# Altium PCB PCB2_homemade.PcbDoc (part 3 of 3)
Units mil, origin at the board's own origin, x right, y up, seen from the top; angles counter-clockwise.
Board outline 1822.68 x 4094.49 mil, 2 copper layers (Top Layer, Bottom Layer); 17 components, 26 nets, 94 pads, 23 vias.
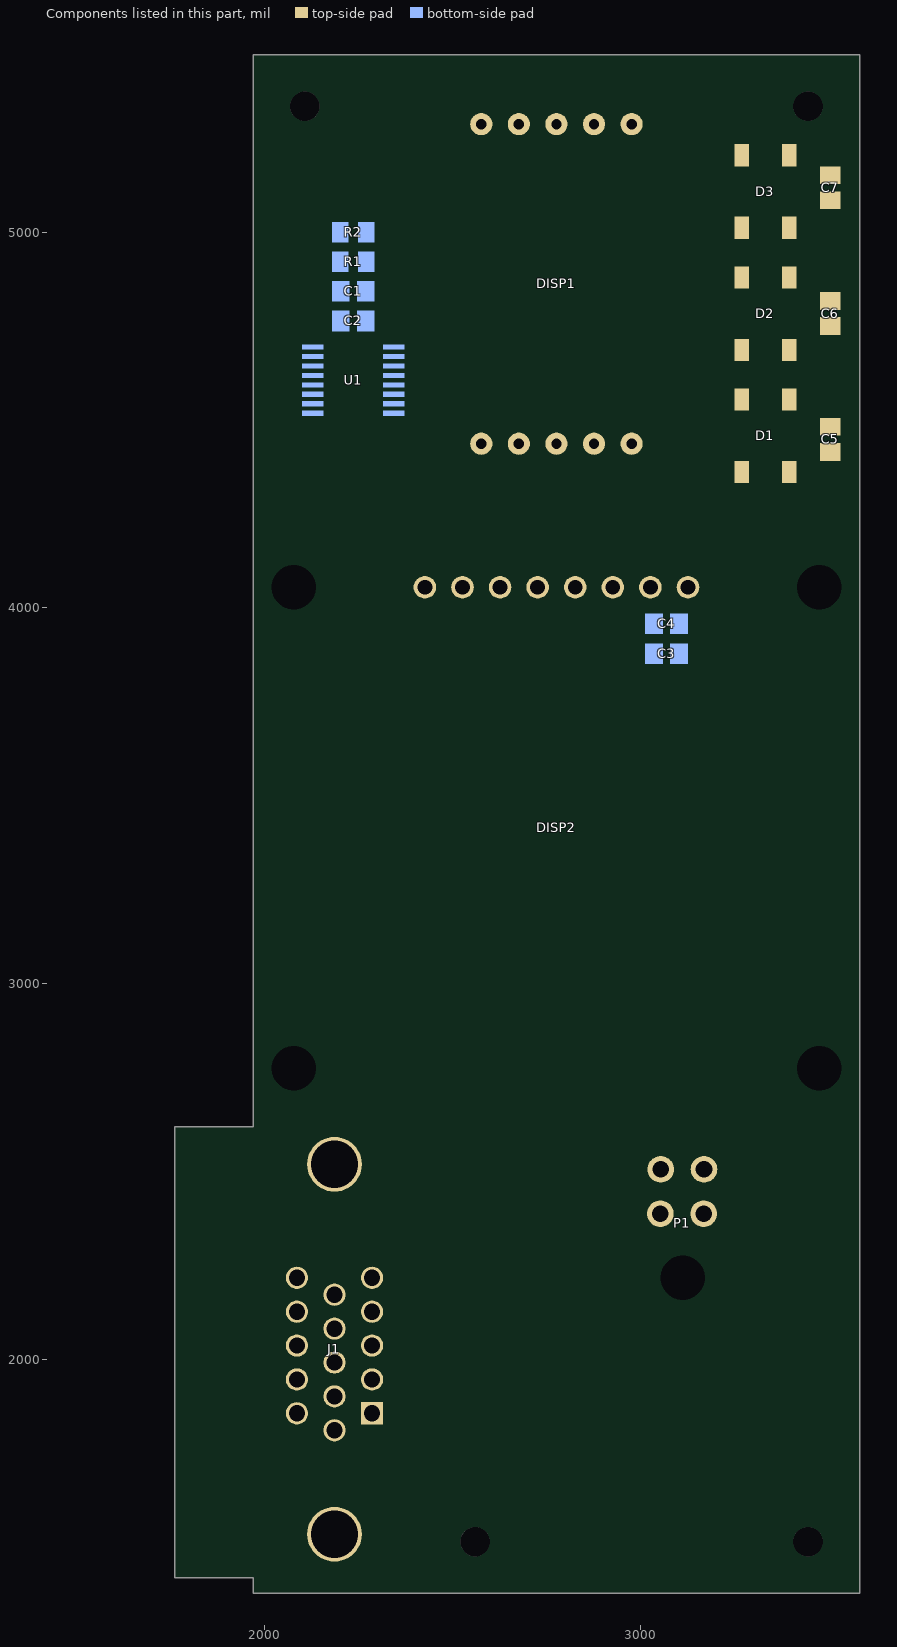
[diagram p3: the components of this part, seen from the top]

## Via types
v1: diameter 35.43/35.43 (per signal layer), hole 11.81, Top Layer to Bottom Layer, tented both sides, 23 vias

## Nets (pads, with @x,y where several pads share a name; then routed paths per layer and width w, separated by ;. In a path a pad name is that pad's centre, name@x,y a point inside that pad or via, vN(x,y) a via of type N, cw(c..) or ccw(c..) an arc to the next point about the centre after c; other vN are vias at no path point) (continued)
copper on no net: (continued)
  Bottom Layer w1: 3002.91,1752.95 3033.91,1752.95 ; 3002.91,1753.95 3033.91,1753.95 ; 3002.91,1754.95 3033.91,1754.95 ; 3003.91,1751.95 3033.91,1751.95 ; 3004.91,1750.95 3033.91,1750.95 ; 3005.91,1795.95 3340.91,1795.95 ; 3005.91,1837.95 3340.91,1837.95 ; 3006.91,1668.95 3035.91,1668.95 ; 3006.91,1669.95 3035.91,1669.95 ; 3006.91,1670.95 3036.91,1670.95 ; 3006.91,1671.95 3036.91,1671.95 ; 3006.91,1672.95 3037.91,1672.95 ; 3006.91,1673.95 3037.91,1673.95 ; 3006.91,1674.95 3038.91,1674.95 ; 3006.91,1675.95 3039.91,1675.95 ; 3006.91,1676.95 3040.91,1676.95 ; 3006.91,1677.95 3041.91,1677.95 ; 3006.91,1852.95 3048.91,1852.95 ; 3007.91,1665.95 3036.91,1665.95 ; 3007.91,1666.95 3035.91,1666.95 ; 3007.91,1667.95 3035.91,1667.95 ; 3007.91,1678.95 3043.91,1678.95 ; 3007.91,1679.95 3340.91,1679.95 ; 3007.91,1727.95 3009.91,1727.95 ; 3008.91,1662.95 3035.91,1662.95 ; 3008.91,1663.95 3080.91,1663.95 ; 3008.91,1664.95 3037.91,1664.95 ; 3008.91,1680.95 3340.91,1680.95 ; 3009.91,1661.95 3035.91,1661.95 ; 3009.91,1697.95 3033.91,1697.95 ; 3009.91,1698.95 3033.91,1698.95 ; 3009.91,1838.95 3340.91,1838.95 ; 3010.91,1659.95 3035.91,1659.95 ; 3010.91,1660.95 3035.91,1660.95 ; 3010.91,1681.95 3340.91,1681.95 ; 3010.91,1749.95 3033.91,1749.95 ; 3010.91,1794.95 3340.91,1794.95 ; 3010.91,1853.95 3053.91,1853.95 ; 3011.91,1682.95 3340.91,1682.95 ; 3011.91,1685.95 3340.91,1685.95 ; 3011.91,1686.95 3340.91,1686.95 ; 3011.91,1696.95 3033.91,1696.95 ; 3012.91,1687.95 3340.91,1687.95 ; 3012.91,1688.95 3340.91,1688.95 ; 3012.91,1689.95 3340.91,1689.95 ; 3012.91,1690.95 3033.91,1690.95 ; 3012.91,1691.95 3033.91,1691.95 ; 3012.91,1692.95 3033.91,1692.95 ; 3012.91,1693.95 3033.91,1693.95 ; 3012.91,1694.95 3033.91,1694.95 ; 3012.91,1695.95 3033.91,1695.95 ; 3012.91,1839.95 3340.91,1839.95 ; 3013.91,1683.95 3340.91,1683.95 ; 3013.91,1684.95 3340.91,1684.95 ; 3014.91,1793.95 3340.91,1793.95 ; 3015.91,1719.95 3033.91,1719.95 ; 3015.91,1720.95 3020.91,1720.95 ; 3015.91,1721.95 3020.91,1721.95 ; 3015.91,1722.95 3020.91,1722.95 ; 3015.91,1723.95 3020.91,1723.95 ; 3015.91,1854.95 3059.91,1854.95 ; 3016.91,1724.95 3019.91,1724.95 ; 3016.91,1725.95 3019.91,1725.95 ; 3016.91,1840.95 3340.91,1840.95 ; 3017.91,1726.95 3019.91,1726.95 ; 3018.91,1792.95 3340.91,1792.95 ; 3020.91,1791.95 3340.91,1791.95 ; 3020.91,1841.95 3340.91,1841.95 ; 3020.91,1855.95 3065.91,1855.95 ; 3022.91,1720.95 3033.91,1720.95 ; 3022.91,1721.95 3033.91,1721.95 ; 3022.91,1748.95 3033.91,1748.95 ; 3023.91,1722.95 3033.91,1722.95 ; 3023.91,1723.95 3033.91,1723.95 ; 3023.91,1724.95 3033.91,1724.95 ; 3023.91,1725.95 3033.91,1725.95 ; 3023.91,1790.95 3340.91,1790.95 ; 3024.91,1726.95 3033.91,1726.95 ; 3024.91,1727.95 3033.91,1727.95 ; 3024.91,1728.95 3033.91,1728.95 ; 3024.91,1747.95 3033.91,1747.95 ; 3025.91,1729.95 3033.91,1729.95 ; 3025.91,1730.95 3033.91,1730.95 ; 3025.91,1731.95 3033.91,1731.95 ; 3025.91,1746.95 3033.91,1746.95 ; 3025.91,1789.95 3340.91,1789.95 ; 3025.91,1842.95 3340.91,1842.95 ; 3025.91,1856.95 3072.91,1856.95 ; 3026.91,1732.95 3033.91,1732.95 ; 3026.91,1733.95 3033.91,1733.95 ; 3026.91,1734.95 3033.91,1734.95 ; 3026.91,1745.95 3033.91,1745.95 ; 3027.91,1735.95 3033.91,1735.95 ; 3027.91,1736.95 3033.91,1736.95 ; 3027.91,1737.95 3033.91,1737.95 ; 3027.91,1738.95 3033.91,1738.95 ; 3027.91,1739.95 3033.91,1739.95 ; 3027.91,1740.95 3033.91,1740.95 ; 3027.91,1741.95 3033.91,1741.95 ; 3027.91,1742.95 3033.91,1742.95 ; 3027.91,1743.95 3033.91,1743.95 ; 3027.91,1744.95 3033.91,1744.95 ; 3027.91,1788.95 3340.91,1788.95 ; 3029.91,1787.95 3340.91,1787.95 ; 3029.91,1843.95 3340.91,1843.95 ; 3030.91,1785.95 3340.91,1785.95 ; 3030.91,1786.95 3340.91,1786.95 ; 3030.91,1857.95 3078.91,1857.95 ; 3034.91,1844.95 3340.91,1844.95 ; 3036.91,1858.95 3086.91,1858.95 ; 3039.91,1845.95 3340.91,1845.95 ; 3042.91,1664.95 3080.91,1664.95 ; 3042.91,1859.95 3095.91,1859.95 ; 3043.91,1649.95 3080.91,1649.95 ; 3043.91,1650.95 3080.91,1650.95 ; 3043.91,1651.95 3080.91,1651.95 ; 3043.91,1652.95 3080.91,1652.95 ; 3043.91,1653.95 3080.91,1653.95 ; 3043.91,1654.95 3080.91,1654.95 ; 3043.91,1665.95 3080.91,1665.95 ; 3043.91,1666.95 3080.91,1666.95 ; 3043.91,1667.95 3080.91,1667.95 ; 3043.91,1668.95 3079.91,1668.95 ; 3044.91,1647.95 3080.91,1647.95 ; 3044.91,1648.95 3080.91,1648.95 ; 3044.91,1669.95 3079.91,1669.95 ; 3044.91,1670.95 3078.91,1670.95 ; 3045.91,1646.95 3080.91,1646.95 ; 3045.91,1671.95 3077.91,1671.95 ; 3045.91,1846.95 3340.91,1846.95 ; 3048.91,1860.95 3106.91,1860.95 ; 3050.91,1645.95 3080.91,1645.95 ; 3050.91,1847.95 3340.91,1847.95 ; 3054.91,1861.95 3340.91,1861.95 ; 3055.91,1848.95 3340.91,1848.95 ; 3056.91,1690.95 3093.91,1690.95 ; 3056.91,1691.95 3093.91,1691.95 ; 3056.91,1692.95 3093.91,1692.95 ; 3056.91,1693.95 3093.91,1693.95 ; 3056.91,1694.95 3093.91,1694.95 ; 3056.91,1695.95 3093.91,1695.95 ; 3056.91,1696.95 3093.91,1696.95 ; 3056.91,1697.95 3093.91,1697.95 ; 3056.91,1698.95 3093.91,1698.95 ; 3056.91,1699.95 3093.91,1699.95 ; 3056.91,1700.95 3093.91,1700.95 ; 3056.91,1701.95 3093.91,1701.95 ; 3056.91,1702.95 3093.91,1702.95 ; 3056.91,1703.95 3093.91,1703.95 ; 3056.91,1704.95 3093.91,1704.95 ; 3056.91,1705.95 3093.91,1705.95 ; 3056.91,1706.95 3093.91,1706.95 ; 3056.91,1707.95 3093.91,1707.95 ; 3056.91,1708.95 3093.91,1708.95 ; 3056.91,1709.95 3093.91,1709.95 ; 3056.91,1710.95 3093.91,1710.95 ; 3056.91,1711.95 3093.91,1711.95 ; 3056.91,1712.95 3093.91,1712.95 ; 3056.91,1713.95 3093.91,1713.95 ; 3056.91,1714.95 3093.91,1714.95 ; 3056.91,1715.95 3093.91,1715.95 ; 3056.91,1716.95 3093.91,1716.95 ; 3056.91,1717.95 3093.91,1717.95 ; 3056.91,1718.95 3093.91,1718.95 ; 3056.91,1719.95 3093.91,1719.95 ; 3056.91,1741.95 3093.91,1741.95 ; 3056.91,1742.95 3093.91,1742.95 ; 3056.91,1743.95 3093.91,1743.95 ; 3056.91,1744.95 3093.91,1744.95 ; 3056.91,1745.95 3093.91,1745.95 ; 3056.91,1746.95 3093.91,1746.95 ; 3056.91,1747.95 3093.91,1747.95 ; 3056.91,1748.95 3093.91,1748.95 ; 3056.91,1749.95 3093.91,1749.95 ; 3056.91,1750.95 3093.91,1750.95 ; 3056.91,1751.95 3093.91,1751.95 ; 3056.91,1752.95 3093.91,1752.95 ; 3056.91,1753.95 3093.91,1753.95 ; 3056.91,1754.95 3093.91,1754.95 ; 3056.91,1755.95 3093.91,1755.95 ; 3056.91,1756.95 3093.91,1756.95 ; 3056.91,1757.95 3093.91,1757.95 ; 3056.91,1758.95 3093.91,1758.95 ; 3056.91,1759.95 3093.91,1759.95 ; 3056.91,1760.95 3093.91,1760.95 ; 3056.91,1761.95 3093.91,1761.95 ; 3056.91,1762.95 3093.91,1762.95 ; 3056.91,1763.95 3093.91,1763.95 ; 3056.91,1764.95 3093.91,1764.95 ; 3056.91,1765.95 3093.91,1765.95 ; 3056.91,1766.95 3093.91,1766.95 ; 3056.91,1767.95 3093.91,1767.95 ; 3056.91,1768.95 3093.91,1768.95 ; 3056.91,1769.95 3093.91,1769.95 ; 3056.91,1770.95 3093.91,1770.95 ; 3056.91,1771.95 3095.91,1771.95 ; 3060.91,1849.95 3340.91,1849.95 ; 3060.91,1862.95 3340.91,1862.95 ; 3065.91,1662.95 3080.91,1662.95 ; 3066.91,1655.95 3080.91,1655.95 ; 3066.91,1850.95 3340.91,1850.95 ; 3067.91,1661.95 3080.91,1661.95 ; 3067.91,1863.95 3340.91,1863.95 ; 3068.91,1656.95 3080.91,1656.95 ; 3068.91,1657.95 3080.91,1657.95 ; 3068.91,1658.95 3080.91,1658.95 ; 3068.91,1659.95 3080.91,1659.95 ; 3068.91,1660.95 3080.91,1660.95 ; 3071.91,1851.95 3340.91,1851.95 ; 3075.91,1638.95 3080.91,1638.95 ; 3075.91,1864.95 3340.91,1864.95 ; 3076.91,1852.95 3340.91,1852.95 ; 3077.91,1639.95 3080.91,1639.95 ; 3077.91,1643.95 3080.91,1643.95 ; 3077.91,1644.95 3080.91,1644.95 ; 3078.91,1640.95 3080.91,1640.95 ; 3078.91,1641.95 3080.91,1641.95 ; 3078.91,1642.95 3080.91,1642.95 ; 3079.91,1678.95 3122.91,1678.95 ; 3081.91,1677.95 3121.91,1677.95 ; 3082.91,1853.95 3340.91,1853.95 ; 3083.91,1676.95 3119.91,1676.95 ; 3083.91,1865.95 3340.91,1865.95 ; 3084.91,1675.95 3118.91,1675.95 ; 3085.91,1673.95 3116.91,1673.95 ; 3085.91,1674.95 3117.91,1674.95 ; 3086.91,1672.95 3115.91,1672.95 ; 3087.91,1645.95 3092.91,1645.95 ; 3087.91,1646.95 3095.91,1646.95 ; 3087.91,1666.95 3111.91,1666.95 ; 3087.91,1667.95 3111.91,1667.95 ; 3087.91,1668.95 3112.91,1668.95 ; 3087.91,1669.95 3113.91,1669.95 ; 3087.91,1670.95 3114.91,1670.95 ; 3087.91,1671.95 3114.91,1671.95 ; 3087.91,1854.95 3340.91,1854.95 ; 3088.91,1647.95 3097.91,1647.95 ; 3088.91,1648.95 3098.91,1648.95 ; 3088.91,1649.95 3099.91,1649.95 ; 3088.91,1650.95 3100.91,1650.95 ; 3088.91,1651.95 3101.91,1651.95 ; 3088.91,1652.95 3101.91,1652.95 ; 3088.91,1653.95 3102.91,1653.95 ; 3088.91,1654.95 3103.91,1654.95 ; 3088.91,1655.95 3103.91,1655.95 ; 3088.91,1656.95 3104.91,1656.95 ; 3088.91,1657.95 3105.91,1657.95 ; 3088.91,1658.95 3105.91,1658.95 ; 3088.91,1659.95 3106.91,1659.95 ; 3088.91,1660.95 3107.91,1660.95 ; 3088.91,1661.95 3107.91,1661.95 ; 3088.91,1662.95 3108.91,1662.95 ; 3088.91,1663.95 3109.91,1663.95 ; 3088.91,1664.95 3109.91,1664.95 ; 3088.91,1665.95 3110.91,1665.95 ; 3092.91,1866.95 3204.91,1866.95 ; 3093.91,1855.95 3340.91,1855.95 ; 3095.91,1638.95 3136.91,1638.95 ; 3098.91,1639.95 3134.91,1639.95 ; 3099.91,1856.95 3340.91,1856.95 ; 3100.91,1640.95 3133.91,1640.95 ; 3101.91,1641.95 3133.91,1641.95 ; 3102.91,1642.95 3133.91,1642.95 ; 3103.91,1643.95 3133.91,1643.95 ; 3103.91,1867.95 3186.91,1867.95 ; 3104.91,1644.95 3133.91,1644.95 ; 3105.91,1645.95 3133.91,1645.95 ; 3105.91,1857.95 3340.91,1857.95 ; 3106.91,1646.95 3133.91,1646.95 ; 3107.91,1647.95 3133.91,1647.95 ; 3108.91,1648.95 3133.91,1648.95 ; 3108.91,1649.95 3133.91,1649.95 ; 3109.91,1650.95 3133.91,1650.95 ; 3110.91,1651.95 3133.91,1651.95 ; 3111.91,1652.95 3133.91,1652.95 ; 3111.91,1653.95 3133.91,1653.95 ; 3112.91,1654.95 3133.91,1654.95 ; 3113.91,1655.95 3133.91,1655.95 ; 3113.91,1656.95 3133.91,1656.95 ; 3113.91,1858.95 3340.91,1858.95 ; 3114.91,1657.95 3133.91,1657.95 ; 3115.91,1658.95 3133.91,1658.95 ; 3115.91,1659.95 3133.91,1659.95 ; 3116.91,1660.95 3133.91,1660.95 ; 3116.91,1661.95 3133.91,1661.95 ; 3116.91,1690.95 3144.91,1690.95 ; 3116.91,1691.95 3140.91,1691.95 ; 3116.91,1692.95 3138.91,1692.95 ; 3116.91,1693.95 3136.91,1693.95 ; 3116.91,1694.95 3134.91,1694.95 ; 3116.91,1695.95 3133.91,1695.95 ; 3116.91,1696.95 3131.91,1696.95 ; 3116.91,1697.95 3130.91,1697.95 ; 3116.91,1698.95 3129.91,1698.95 ; 3116.91,1699.95 3128.91,1699.95 ; 3116.91,1700.95 3127.91,1700.95 ; 3116.91,1701.95 3126.91,1701.95 ; 3116.91,1702.95 3125.91,1702.95 ; 3116.91,1703.95 3125.91,1703.95 ; 3116.91,1704.95 3124.91,1704.95 ; 3116.91,1705.95 3123.91,1705.95 ; 3116.91,1706.95 3123.91,1706.95 ; 3116.91,1707.95 3122.91,1707.95 ; 3116.91,1708.95 3122.91,1708.95 ; 3116.91,1709.95 3122.91,1709.95 ; 3116.91,1710.95 3121.91,1710.95 ; 3116.91,1711.95 3121.91,1711.95 ; 3116.91,1712.95 3121.91,1712.95 ; 3116.91,1713.95 3121.91,1713.95 ; 3116.91,1714.95 3121.91,1714.95 ; 3116.91,1715.95 3121.91,1715.95 ; 3116.91,1716.95 3120.91,1716.95 ; 3116.91,1717.95 3120.91,1717.95 ; 3116.91,1718.95 3120.91,1718.95 ; 3116.91,1719.95 3120.91,1719.95 ; 3116.91,1741.95 3184.91,1741.95 ; 3116.91,1742.95 3184.91,1742.95 ; 3116.91,1743.95 3184.91,1743.95 ; 3116.91,1744.95 3120.91,1744.95 ; 3116.91,1745.95 3120.91,1745.95 ; 3116.91,1746.95 3120.91,1746.95 ; 3116.91,1747.95 3120.91,1747.95 ; 3116.91,1748.95 3120.91,1748.95 ; 3116.91,1749.95 3121.91,1749.95 ; 3116.91,1750.95 3121.91,1750.95 ; 3116.91,1751.95 3121.91,1751.95 ; 3116.91,1752.95 3122.91,1752.95 ; 3116.91,1753.95 3122.91,1753.95 ; 3116.91,1754.95 3123.91,1754.95 ; 3116.91,1755.95 3123.91,1755.95 ; 3116.91,1756.95 3124.91,1756.95 ; 3116.91,1757.95 3124.91,1757.95 ; 3116.91,1758.95 3125.91,1758.95 ; 3116.91,1759.95 3126.91,1759.95 ; 3116.91,1760.95 3127.91,1760.95 ; 3116.91,1761.95 3128.91,1761.95 ; 3116.91,1762.95 3129.91,1762.95 ; 3116.91,1763.95 3130.91,1763.95 ; 3116.91,1764.95 3131.91,1764.95 ; 3116.91,1765.95 3133.91,1765.95 ; 3116.91,1766.95 3135.91,1766.95 ; 3116.91,1767.95 3136.91,1767.95 ; 3116.91,1768.95 3139.91,1768.95 ; 3116.91,1769.95 3141.91,1769.95 ; 3116.91,1770.95 3145.91,1770.95 ; 3116.91,1771.95 3152.91,1771.95 ; 3116.91,1868.95 3165.91,1868.95 ; 3117.91,1662.95 3133.91,1662.95 ; 3118.91,1663.95 3133.91,1663.95 ; 3119.91,1664.95 3133.91,1664.95 ; 3119.91,1665.95 3133.91,1665.95 ; 3120.91,1666.95 3133.91,1666.95 ; 3121.91,1667.95 3133.91,1667.95 ; 3122.91,1668.95 3133.91,1668.95 ; 3122.91,1859.95 3340.91,1859.95 ; 3122.91,1860.95 3340.91,1860.95 ; 3123.91,1669.95 3133.91,1669.95 ; 3124.91,1670.95 3133.91,1670.95 ; 3125.91,1671.95 3133.91,1671.95 ; 3138.91,1638.95 3148.91,1638.95 ; 3138.91,1873.95 3340.91,1873.95 ; 3140.91,1639.95 3146.91,1639.95 ; 3141.91,1640.95 3145.91,1640.95 ; 3141.91,1641.95 3145.91,1641.95 ; 3141.91,1642.95 3145.91,1642.95 ; 3141.91,1643.95 3145.91,1643.95 ; 3141.91,1644.95 3145.91,1644.95 ; 3141.91,1645.95 3145.91,1645.95 ; 3141.91,1646.95 3145.91,1646.95 ; 3141.91,1647.95 3145.91,1647.95 ; 3141.91,1648.95 3145.91,1648.95 ; 3141.91,1649.95 3145.91,1649.95 ; 3141.91,1650.95 3145.91,1650.95 ; 3141.91,1651.95 3145.91,1651.95 ; 3141.91,1652.95 3145.91,1652.95 ; 3141.91,1653.95 3145.91,1653.95 ; 3141.91,1654.95 3145.91,1654.95 ; 3141.91,1655.95 3145.91,1655.95 ; 3141.91,1656.95 3145.91,1656.95 ; 3141.91,1657.95 3145.91,1657.95 ; 3141.91,1658.95 3145.91,1658.95 ; 3141.91,1659.95 3145.91,1659.95 ; 3141.91,1660.95 3145.91,1660.95 ; 3141.91,1661.95 3145.91,1661.95 ; 3141.91,1662.95 3145.91,1662.95 ; 3141.91,1663.95 3145.91,1663.95 ; 3141.91,1664.95 3145.91,1664.95 ; 3141.91,1665.95 3145.91,1665.95 ; 3141.91,1666.95 3145.91,1666.95 ; 3141.91,1667.95 3145.91,1667.95 ; 3141.91,1668.95 3145.91,1668.95 ; 3141.91,1669.95 3145.91,1669.95 ; 3141.91,1670.95 3145.91,1670.95 ; 3141.91,1671.95 3145.91,1671.95 ; 3141.91,1672.95 3145.91,1672.95 ; 3141.91,1673.95 3145.91,1673.95 ; 3141.91,1674.95 3145.91,1674.95 ; 3141.91,1675.95 3145.91,1675.95 ; 3141.91,1676.95 3145.91,1676.95 ; 3141.91,1677.95 3145.91,1677.95 ; 3141.91,1678.95 3146.91,1678.95 ; 3143.91,1717.95 3184.91,1717.95 ; 3143.91,1718.95 3184.91,1718.95 ; 3143.91,1719.95 3184.91,1719.95 ; 3143.91,1744.95 3184.91,1744.95 ; 3144.91,1714.95 3184.91,1714.95 ; 3144.91,1715.95 3184.91,1715.95 ; 3144.91,1716.95 3184.91,1716.95 ; 3144.91,1745.95 3184.91,1745.95 ; 3144.91,1746.95 3183.91,1746.95 ; 3145.91,1713.95 3211.91,1713.95 ; 3145.91,1747.95 3182.91,1747.95 ; 3146.91,1712.95 3211.91,1712.95 ; 3146.91,1748.95 3181.91,1748.95 ; 3148.91,1711.95 3211.91,1711.95 ; 3148.91,1749.95 3180.91,1749.95 ; 3150.91,1638.95 3160.91,1638.95 ; 3152.91,1639.95 3158.91,1639.95 ; 3152.91,1678.95 3159.91,1678.95 ; 3153.91,1640.95 3157.91,1640.95 ; 3153.91,1641.95 3157.91,1641.95 ; 3153.91,1642.95 3157.91,1642.95 ; 3153.91,1643.95 3157.91,1643.95 ; 3153.91,1644.95 3158.91,1644.95 ; 3153.91,1645.95 3186.91,1645.95 ; 3153.91,1646.95 3191.91,1646.95 ; 3153.91,1647.95 3192.91,1647.95 ; 3153.91,1648.95 3193.91,1648.95 ; 3153.91,1649.95 3193.91,1649.95 ; 3153.91,1650.95 3193.91,1650.95 ; 3153.91,1651.95 3193.91,1651.95 ; 3153.91,1652.95 3193.91,1652.95 ; 3153.91,1653.95 3193.91,1653.95 ; 3153.91,1654.95 3193.91,1654.95 ; 3153.91,1655.95 3193.91,1655.95 ; 3153.91,1656.95 3193.91,1656.95 ; 3153.91,1657.95 3193.91,1657.95 ; 3153.91,1658.95 3193.91,1658.95 ; 3153.91,1659.95 3193.91,1659.95 ; 3153.91,1660.95 3193.91,1660.95 ; 3153.91,1661.95 3193.91,1661.95 ; 3153.91,1662.95 3193.91,1662.95 ; 3153.91,1663.95 3193.91,1663.95 ; 3153.91,1664.95 3193.91,1664.95 ; 3153.91,1665.95 3193.91,1665.95 ; 3153.91,1666.95 3193.91,1666.95 ; 3153.91,1667.95 3193.91,1667.95 ; 3153.91,1668.95 3193.91,1668.95 ; 3153.91,1669.95 3193.91,1669.95 ; 3153.91,1670.95 3192.91,1670.95 ; 3153.91,1671.95 3191.91,1671.95 ; 3153.91,1672.95 3159.91,1672.95 ; 3153.91,1673.95 3158.91,1673.95 ; 3153.91,1674.95 3157.91,1674.95 ; 3153.91,1675.95 3157.91,1675.95 ; 3153.91,1676.95 3157.91,1676.95 ; 3153.91,1677.95 3157.91,1677.95 ; 3167.91,1720.95 3184.91,1720.95 ; 3167.91,1721.95 3184.91,1721.95 ; 3167.91,1722.95 3184.91,1722.95 ; 3167.91,1723.95 3184.91,1723.95 ; 3167.91,1724.95 3184.91,1724.95 ; 3167.91,1725.95 3184.91,1725.95 ; 3167.91,1726.95 3184.91,1726.95 ; 3167.91,1727.95 3184.91,1727.95 ; 3167.91,1728.95 3184.91,1728.95 ; 3167.91,1729.95 3184.91,1729.95 ; 3167.91,1730.95 3184.91,1730.95 ; 3167.91,1731.95 3184.91,1731.95 ; 3167.91,1732.95 3184.91,1732.95 ; 3167.91,1733.95 3184.91,1733.95 ; 3167.91,1734.95 3184.91,1734.95 ; 3167.91,1735.95 3184.91,1735.95 ; 3167.91,1736.95 3184.91,1736.95 ; 3167.91,1737.95 3184.91,1737.95 ; 3167.91,1738.95 3184.91,1738.95 ; 3167.91,1739.95 3184.91,1739.95 ; 3167.91,1740.95 3184.91,1740.95 ; 3172.91,1872.95 3340.91,1872.95 ; 3176.91,1771.95 3213.91,1771.95 ; 3180.91,1871.95 3340.91,1871.95 ; 3183.91,1770.95 3211.91,1770.95 ; 3187.91,1769.95 3211.91,1769.95 ; 3189.91,1768.95 3211.91,1768.95 ; 3189.91,1870.95 3340.91,1870.95 ; 3190.91,1638.95 3208.91,1638.95 ; 3191.91,1767.95 3211.91,1767.95 ; 3193.91,1639.95 3206.91,1639.95 ; 3193.91,1678.95 3206.91,1678.95 ; 3193.91,1766.95 3211.91,1766.95 ; 3195.91,1640.95 3206.91,1640.95 ; 3195.91,1677.95 3206.91,1677.95 ; 3195.91,1765.95 3211.91,1765.95 ; 3196.91,1764.95 3211.91,1764.95 ; 3196.91,1869.95 3340.91,1869.95 ; 3197.91,1641.95 3206.91,1641.95 ; 3197.91,1676.95 3206.91,1676.95 ; 3197.91,1763.95 3211.91,1763.95 ; 3198.91,1642.95 3206.91,1642.95 ; 3198.91,1675.95 3206.91,1675.95 ; 3199.91,1643.95 3206.91,1643.95 ; 3199.91,1644.95 3206.91,1644.95 ; 3199.91,1673.95 3206.91,1673.95 ; 3199.91,1674.95 3206.91,1674.95 ; 3199.91,1762.95 3211.91,1762.95 ; 3200.91,1645.95 3206.91,1645.95 ; 3200.91,1646.95 3206.91,1646.95 ; 3200.91,1671.95 3206.91,1671.95 ; 3200.91,1672.95 3206.91,1672.95 ; 3200.91,1761.95 3211.91,1761.95 ; 3201.91,1647.95 3206.91,1647.95 ; 3201.91,1648.95 3206.91,1648.95 ; 3201.91,1649.95 3206.91,1649.95 ; 3201.91,1650.95 3206.91,1650.95 ; 3201.91,1651.95 3206.91,1651.95 ; 3201.91,1652.95 3206.91,1652.95 ; 3201.91,1653.95 3206.91,1653.95 ; 3201.91,1654.95 3206.91,1654.95 ; 3201.91,1655.95 3206.91,1655.95 ; 3201.91,1656.95 3206.91,1656.95 ; 3201.91,1657.95 3206.91,1657.95 ; 3201.91,1658.95 3206.91,1658.95 ; 3201.91,1659.95 3206.91,1659.95 ; 3201.91,1660.95 3206.91,1660.95 ; 3201.91,1661.95 3206.91,1661.95 ; 3201.91,1662.95 3206.91,1662.95 ; 3201.91,1663.95 3206.91,1663.95 ; 3201.91,1664.95 3206.91,1664.95 ; 3201.91,1665.95 3206.91,1665.95 ; 3201.91,1666.95 3206.91,1666.95 ; 3201.91,1667.95 3206.91,1667.95 ; 3201.91,1668.95 3206.91,1668.95 ; 3201.91,1669.95 3206.91,1669.95 ; 3201.91,1670.95 3206.91,1670.95 ; 3201.91,1759.95 3211.91,1759.95 ; 3201.91,1760.95 3211.91,1760.95 ; 3202.91,1758.95 3211.91,1758.95 ; 3203.91,1757.95 3211.91,1757.95 ; 3204.91,1755.95 3211.91,1755.95 ; 3204.91,1756.95 3211.91,1756.95 ; 3205.91,1753.95 3211.91,1753.95 ; 3205.91,1754.95 3211.91,1754.95 ; 3206.91,1750.95 3211.91,1750.95 ; 3206.91,1751.95 3211.91,1751.95 ; 3206.91,1752.95 3211.91,1752.95 ; 3207.91,1745.95 3211.91,1745.95 ; 3207.91,1746.95 3211.91,1746.95 ; 3207.91,1747.95 3211.91,1747.95 ; 3207.91,1748.95 3211.91,1748.95 ; 3207.91,1749.95 3211.91,1749.95 ; 3207.91,1866.95 3340.91,1866.95 ; 3207.91,1867.95 3340.91,1867.95 ; 3207.91,1868.95 3340.91,1868.95 ; 3208.91,1714.95 3211.91,1714.95 ; 3208.91,1715.95 3211.91,1715.95 ; 3208.91,1716.95 3211.91,1716.95 ; 3208.91,1717.95 3211.91,1717.95 ; 3208.91,1718.95 3211.91,1718.95 ; 3208.91,1719.95 3211.91,1719.95 ; 3208.91,1720.95 3211.91,1720.95 ; 3208.91,1721.95 3211.91,1721.95 ; 3208.91,1722.95 3211.91,1722.95 ; 3208.91,1723.95 3211.91,1723.95 ; 3208.91,1724.95 3211.91,1724.95 ; 3208.91,1725.95 3211.91,1725.95 ; 3208.91,1726.95 3211.91,1726.95 ; 3208.91,1727.95 3211.91,1727.95 ; 3208.91,1728.95 3211.91,1728.95 ; 3208.91,1729.95 3211.91,1729.95 ; 3208.91,1730.95 3211.91,1730.95 ; 3208.91,1731.95 3211.91,1731.95 ; 3208.91,1732.95 3211.91,1732.95 ; 3208.91,1733.95 3211.91,1733.95 ; 3208.91,1734.95 3211.91,1734.95 ; 3208.91,1735.95 3211.91,1735.95 ; 3208.91,1736.95 3211.91,1736.95 ; 3208.91,1737.95 3211.91,1737.95 ; 3208.91,1738.95 3211.91,1738.95 ; 3208.91,1739.95 3211.91,1739.95 ; 3208.91,1740.95 3211.91,1740.95 ; 3208.91,1741.95 3211.91,1741.95 ; 3208.91,1742.95 3211.91,1742.95 ; 3208.91,1743.95 3211.91,1743.95 ; 3208.91,1744.95 3211.91,1744.95 ; 3210.91,1638.95 3257.91,1638.95 ; 3212.91,1639.95 3254.91,1639.95 ; 3213.91,1640.95 3252.91,1640.95 ; 3213.91,1641.95 3251.91,1641.95 ; 3213.91,1642.95 3249.91,1642.95 ; 3213.91,1643.95 3248.91,1643.95 ; 3213.91,1644.95 3247.91,1644.95 ; 3213.91,1645.95 3246.91,1645.95 ; 3213.91,1646.95 3246.91,1646.95 ; 3213.91,1647.95 3245.91,1647.95 ; 3213.91,1648.95 3244.91,1648.95 ; 3213.91,1649.95 3243.91,1649.95 ; 3213.91,1650.95 3243.91,1650.95 ; 3213.91,1651.95 3242.91,1651.95 ; 3213.91,1652.95 3241.91,1652.95 ; 3213.91,1653.95 3241.91,1653.95 ; 3213.91,1654.95 3240.91,1654.95 ; 3213.91,1655.95 3240.91,1655.95 ; 3213.91,1656.95 3239.91,1656.95 ; 3213.91,1657.95 3238.91,1657.95 ; 3213.91,1658.95 3238.91,1658.95 ; 3213.91,1659.95 3237.91,1659.95 ; 3213.91,1660.95 3237.91,1660.95 ; 3213.91,1661.95 3236.91,1661.95 ; 3213.91,1662.95 3235.91,1662.95 ; 3213.91,1663.95 3235.91,1663.95 ; 3213.91,1664.95 3234.91,1664.95 ; 3213.91,1665.95 3233.91,1665.95 ; 3213.91,1666.95 3233.91,1666.95 ; 3213.91,1667.95 3232.91,1667.95 ; 3213.91,1668.95 3231.91,1668.95 ; 3213.91,1669.95 3230.91,1669.95 ; 3213.91,1670.95 3229.91,1670.95 ; 3213.91,1671.95 3227.91,1671.95 ; 3230.91,1678.95 3267.91,1678.95 ; 3232.91,1677.95 3265.91,1677.95 ; 3233.91,1676.95 3263.91,1676.95 ; 3235.91,1675.95 3262.91,1675.95 ; 3235.91,1690.95 3238.91,1690.95 ; 3235.91,1691.95 3238.91,1691.95 ; 3235.91,1692.95 3238.91,1692.95 ; 3235.91,1693.95 3238.91,1693.95 ; 3235.91,1694.95 3238.91,1694.95 ; 3235.91,1695.95 3238.91,1695.95 ; 3235.91,1696.95 3238.91,1696.95 ; 3235.91,1697.95 3238.91,1697.95 ; 3235.91,1698.95 3238.91,1698.95 ; 3235.91,1699.95 3238.91,1699.95 ; 3235.91,1700.95 3238.91,1700.95 ; 3235.91,1701.95 3238.91,1701.95 ; 3235.91,1702.95 3238.91,1702.95 ; 3235.91,1703.95 3238.91,1703.95 ; 3235.91,1704.95 3238.91,1704.95 ; 3235.91,1705.95 3238.91,1705.95 ; 3235.91,1706.95 3238.91,1706.95 ; 3235.91,1707.95 3238.91,1707.95 ; 3235.91,1708.95 3238.91,1708.95 ; 3235.91,1709.95 3238.91,1709.95 ; 3235.91,1710.95 3238.91,1710.95 ; 3235.91,1711.95 3276.91,1711.95 ; 3235.91,1712.95 3275.91,1712.95 ; 3235.91,1713.95 3275.91,1713.95 ; 3235.91,1714.95 3274.91,1714.95 ; 3235.91,1715.95 3274.91,1715.95 ; 3235.91,1716.95 3274.91,1716.95 ; 3235.91,1717.95 3273.91,1717.95 ; 3235.91,1718.95 3273.91,1718.95 ; 3235.91,1719.95 3272.91,1719.95 ; 3235.91,1720.95 3272.91,1720.95 ; 3235.91,1721.95 3271.91,1721.95 ; 3235.91,1722.95 3271.91,1722.95 ; 3235.91,1723.95 3270.91,1723.95 ; 3235.91,1724.95 3270.91,1724.95 ; 3235.91,1725.95 3269.91,1725.95 ; 3235.91,1726.95 3269.91,1726.95 ; 3235.91,1727.95 3268.91,1727.95 ; 3235.91,1728.95 3268.91,1728.95 ; 3235.91,1729.95 3267.91,1729.95 ; 3235.91,1730.95 3267.91,1730.95 ; 3235.91,1731.95 3266.91,1731.95 ; 3235.91,1732.95 3266.91,1732.95 ; 3235.91,1733.95 3265.91,1733.95 ; 3235.91,1734.95 3265.91,1734.95 ; 3235.91,1735.95 3264.91,1735.95 ; 3235.91,1736.95 3264.91,1736.95 ; 3235.91,1737.95 3263.91,1737.95 ; 3235.91,1738.95 3263.91,1738.95 ; 3235.91,1739.95 3262.91,1739.95 ; 3235.91,1740.95 3262.91,1740.95 ; 3235.91,1741.95 3261.91,1741.95 ; 3235.91,1742.95 3260.91,1742.95 ; 3235.91,1743.95 3259.91,1743.95 ; 3235.91,1744.95 3259.91,1744.95 ; 3235.91,1745.95 3258.91,1745.95 ; 3235.91,1746.95 3256.91,1746.95 ; 3235.91,1747.95 3255.91,1747.95 ; 3235.91,1748.95 3253.91,1748.95 ; 3235.91,1749.95 3251.91,1749.95 ; 3236.91,1674.95 3261.91,1674.95 ; 3237.91,1673.95 3261.91,1673.95 ; 3238.91,1671.95 3260.91,1671.95 ; 3238.91,1672.95 3260.91,1672.95 ; 3239.91,1670.95 3259.91,1670.95 ; 3240.91,1669.95 3259.91,1669.95 ; 3241.91,1667.95 3259.91,1667.95 ; 3241.91,1668.95 3259.91,1668.95 ; 3242.91,1666.95 3259.91,1666.95 ; 3243.91,1664.95 3259.91,1664.95 ; 3243.91,1665.95 3259.91,1665.95 ; 3243.91,1771.95 3340.91,1771.95 ; 3244.91,1662.95 3260.91,1662.95 ; 3244.91,1663.95 3260.91,1663.95 ; 3245.91,1661.95 3261.91,1661.95 ; 3246.91,1659.95 3262.91,1659.95 ; 3246.91,1660.95 3261.91,1660.95 ; 3247.91,1657.95 3265.91,1657.95 ; 3247.91,1658.95 3263.91,1658.95 ; 3248.91,1656.95 3267.91,1656.95 ; 3249.91,1654.95 3284.91,1654.95 ; 3249.91,1655.95 3271.91,1655.95 ; 3250.91,1653.95 3286.91,1653.95 ; 3251.91,1651.95 3287.91,1651.95 ; 3251.91,1652.95 3287.91,1652.95 ; 3252.91,1650.95 3287.91,1650.95 ; 3253.91,1649.95 3287.91,1649.95 ; 3254.91,1648.95 3287.91,1648.95 ; 3255.91,1647.95 3286.91,1647.95 ; 3256.91,1646.95 3285.91,1646.95 ; 3256.91,1770.95 3340.91,1770.95 ; 3258.91,1769.95 3340.91,1769.95 ; 3259.91,1645.95 3282.91,1645.95 ; 3260.91,1768.95 3340.91,1768.95 ; 3263.91,1767.95 3340.91,1767.95 ; 3265.91,1766.95 3340.91,1766.95 ; 3267.91,1665.95 3300.91,1665.95 ; 3267.91,1666.95 3300.91,1666.95 ; 3267.91,1667.95 3300.91,1667.95 ; 3267.91,1668.95 3300.91,1668.95 ; 3267.91,1669.95 3300.91,1669.95 ; 3267.91,1765.95 3340.91,1765.95 ; 3268.91,1664.95 3301.91,1664.95 ; 3268.91,1670.95 3299.91,1670.95 ; 3269.91,1671.95 3298.91,1671.95 ; 3269.91,1764.95 3340.91,1764.95 ; 3270.91,1663.95 3301.91,1663.95 ; 3270.91,1763.95 3340.91,1763.95 ; 3272.91,1762.95 3340.91,1762.95 ; 3273.91,1761.95 3340.91,1761.95 ; 3274.91,1760.95 3340.91,1760.95 ; 3275.91,1759.95 3340.91,1759.95 ; 3276.91,1758.95 3340.91,1758.95 ; 3277.91,1757.95 3340.91,1757.95 ; 3278.91,1662.95 3301.91,1662.95 ; 3278.91,1756.95 3340.91,1756.95 ; 3279.91,1754.95 3340.91,1754.95 ; 3279.91,1755.95 3340.91,1755.95 ; 3280.91,1753.95 3340.91,1753.95 ; 3281.91,1751.95 3340.91,1751.95 ; 3281.91,1752.95 3340.91,1752.95 ; 3282.91,1750.95 3340.91,1750.95 ; 3283.91,1748.95 3340.91,1748.95 ; 3283.91,1749.95 3340.91,1749.95 ; 3284.91,1638.95 3303.91,1638.95 ; 3284.91,1746.95 3340.91,1746.95 ; 3284.91,1747.95 3340.91,1747.95 ; 3285.91,1744.95 3340.91,1744.95 ; 3285.91,1745.95 3340.91,1745.95 ; 3286.91,1661.95 3301.91,1661.95 ; 3286.91,1742.95 3340.91,1742.95 ; 3286.91,1743.95 3340.91,1743.95 ; 3287.91,1639.95 3302.91,1639.95 ; 3287.91,1740.95 3340.91,1740.95 ; 3287.91,1741.95 3340.91,1741.95 ; 3288.91,1738.95 3340.91,1738.95 ; 3288.91,1739.95 3340.91,1739.95 ; 3289.91,1640.95 3301.91,1640.95 ; 3289.91,1660.95 3301.91,1660.95 ; 3289.91,1735.95 3340.91,1735.95 ; 3289.91,1736.95 3340.91,1736.95 ; 3289.91,1737.95 3340.91,1737.95 ; 3290.91,1641.95 3300.91,1641.95 ; 3290.91,1733.95 3340.91,1733.95 ; 3290.91,1734.95 3340.91,1734.95 ; 3291.91,1642.95 3300.91,1642.95 ; 3291.91,1659.95 3301.91,1659.95 ; 3291.91,1731.95 3340.91,1731.95 ; 3291.91,1732.95 3340.91,1732.95 ; 3292.91,1643.95 3300.91,1643.95 ; 3292.91,1658.95 3301.91,1658.95 ; 3292.91,1729.95 3340.91,1729.95 ; 3292.91,1730.95 3340.91,1730.95 ; 3293.91,1644.95 3300.91,1644.95 ; 3293.91,1657.95 3300.91,1657.95 ; 3293.91,1727.95 3340.91,1727.95 ; 3293.91,1728.95 3340.91,1728.95 ; 3294.91,1645.95 3300.91,1645.95 ; 3294.91,1646.95 3300.91,1646.95 ; 3294.91,1647.95 3300.91,1647.95 ; 3294.91,1654.95 3300.91,1654.95 ; 3294.91,1655.95 3300.91,1655.95 ; 3294.91,1656.95 3300.91,1656.95 ; 3294.91,1725.95 3340.91,1725.95 ; 3294.91,1726.95 3340.91,1726.95 ; 3295.91,1648.95 3300.91,1648.95 ; 3295.91,1649.95 3300.91,1649.95 ; 3295.91,1650.95 3300.91,1650.95 ; 3295.91,1651.95 3300.91,1651.95 ; 3295.91,1652.95 3300.91,1652.95 ; 3295.91,1653.95 3300.91,1653.95 ; 3295.91,1723.95 3340.91,1723.95 ; 3295.91,1724.95 3340.91,1724.95 ; 3296.91,1721.95 3340.91,1721.95 ; 3296.91,1722.95 3340.91,1722.95 ; 3297.91,1719.95 3340.91,1719.95 ; 3297.91,1720.95 3340.91,1720.95 ; 3298.91,1717.95 3340.91,1717.95 ; 3298.91,1718.95 3340.91,1718.95 ; 3299.91,1715.95 3340.91,1715.95 ; 3299.91,1716.95 3340.91,1716.95 ; 3300.91,1678.95 3340.91,1678.95 ; 3300.91,1713.95 3340.91,1713.95 ; 3300.91,1714.95 3340.91,1714.95 ; 3301.91,1711.95 3340.91,1711.95 ; 3301.91,1712.95 3340.91,1712.95 ; 3302.91,1677.95 3340.91,1677.95 ; 3302.91,1709.95 3340.91,1709.95 ; 3302.91,1710.95 3340.91,1710.95 ; 3303.91,1706.95 3340.91,1706.95 ; 3303.91,1707.95 3340.91,1707.95 ; 3303.91,1708.95 3340.91,1708.95 ; 3304.91,1676.95 3340.91,1676.95 ; 3304.91,1704.95 3340.91,1704.95 ; 3304.91,1705.95 3340.91,1705.95 ; 3305.91,1675.95 3340.91,1675.95 ; 3305.91,1702.95 3340.91,1702.95 ; 3305.91,1703.95 3340.91,1703.95 ; 3306.91,1638.95 3340.91,1638.95 ; 3306.91,1673.95 3340.91,1673.95 ; 3306.91,1674.95 3340.91,1674.95 ; 3306.91,1700.95 3340.91,1700.95 ; 3306.91,1701.95 3340.91,1701.95 ; 3307.91,1639.95 3340.91,1639.95 ; 3307.91,1671.95 3340.91,1671.95 ; 3307.91,1672.95 3340.91,1672.95 ; 3307.91,1698.95 3340.91,1698.95 ; 3307.91,1699.95 3340.91,1699.95 ; 3308.91,1640.95 3340.91,1640.95 ; 3308.91,1641.95 3340.91,1641.95 ; 3308.91,1642.95 3340.91,1642.95 ; 3308.91,1643.95 3340.91,1643.95 ; 3308.91,1644.95 3340.91,1644.95 ; 3308.91,1645.95 3340.91,1645.95 ; 3308.91,1646.95 3340.91,1646.95 ; 3308.91,1647.95 3340.91,1647.95 ; 3308.91,1648.95 3340.91,1648.95 ; 3308.91,1649.95 3340.91,1649.95 ; 3308.91,1650.95 3340.91,1650.95 ; 3308.91,1651.95 3340.91,1651.95 ; 3308.91,1652.95 3340.91,1652.95 ; 3308.91,1653.95 3340.91,1653.95 ; 3308.91,1654.95 3340.91,1654.95 ; 3308.91,1655.95 3340.91,1655.95 ; 3308.91,1656.95 3340.91,1656.95 ; 3308.91,1657.95 3340.91,1657.95 ; 3308.91,1658.95 3340.91,1658.95 ; 3308.91,1659.95 3340.91,1659.95 ; 3308.91,1660.95 3340.91,1660.95 ; 3308.91,1661.95 3340.91,1661.95 ; 3308.91,1662.95 3340.91,1662.95 ; 3308.91,1663.95 3340.91,1663.95 ; 3308.91,1664.95 3340.91,1664.95 ; 3308.91,1665.95 3340.91,1665.95 ; 3308.91,1666.95 3340.91,1666.95 ; 3308.91,1667.95 3340.91,1667.95 ; 3308.91,1668.95 3340.91,1668.95 ; 3308.91,1669.95 3340.91,1669.95 ; 3308.91,1670.95 3340.91,1670.95 ; 3308.91,1695.95 3340.91,1695.95 ; 3308.91,1696.95 3340.91,1696.95 ; 3308.91,1697.95 3340.91,1697.95 ; 3309.91,1693.95 3340.91,1693.95 ; 3309.91,1694.95 3340.91,1694.95 ; 3310.91,1690.95 3340.91,1690.95 ; 3310.91,1691.95 3340.91,1691.95 ; 3310.91,1692.95 3340.91,1692.95

## Polygon pours and split planes (outlines as drawn)
GND on Bottom Layer "Bottom_GND" (solid, remove dead copper, pour order 0): 1968.5,1377.95 1968.5,1420 1760,1420 1760,2620 1968.5,2620 1968.5,5472.44 3582.68,5472.44 3582.68,1377.95

## Keep-outs
Keep-Out Layer:
  lines w10: 1760,1420 1760,2620 1920,2620 1927.09,2620 1968.5,2620 1968.5,4448.82 1968.5,5472.44 3582.68,5472.44 3582.68,1377.95 1968.5,1377.95 1968.5,1420 1760,1420

## Other copper
Bottom Layer:
  text "v 1.1" at 2978.5,1497.95 h60

## Text inside footprints (layer, text, board x,y; h text height)
J1: Top Overlay "15" at 2110.04,2277.16 h50 r90; Top Overlay "1" at 2310.04,1777.16 h50 r90